# Altium PCB LYT Driver.PcbDoc
Units mil, origin at the board's own origin, x right, y up, seen from the top; angles counter-clockwise.
Board outline 3263.43 x 4160.03 mil, 2 copper layers (Top Layer, Bottom Layer); 37 components, 36 nets, 112 pads, 0 vias.
Unrouted connection lines stored in the file: 2.
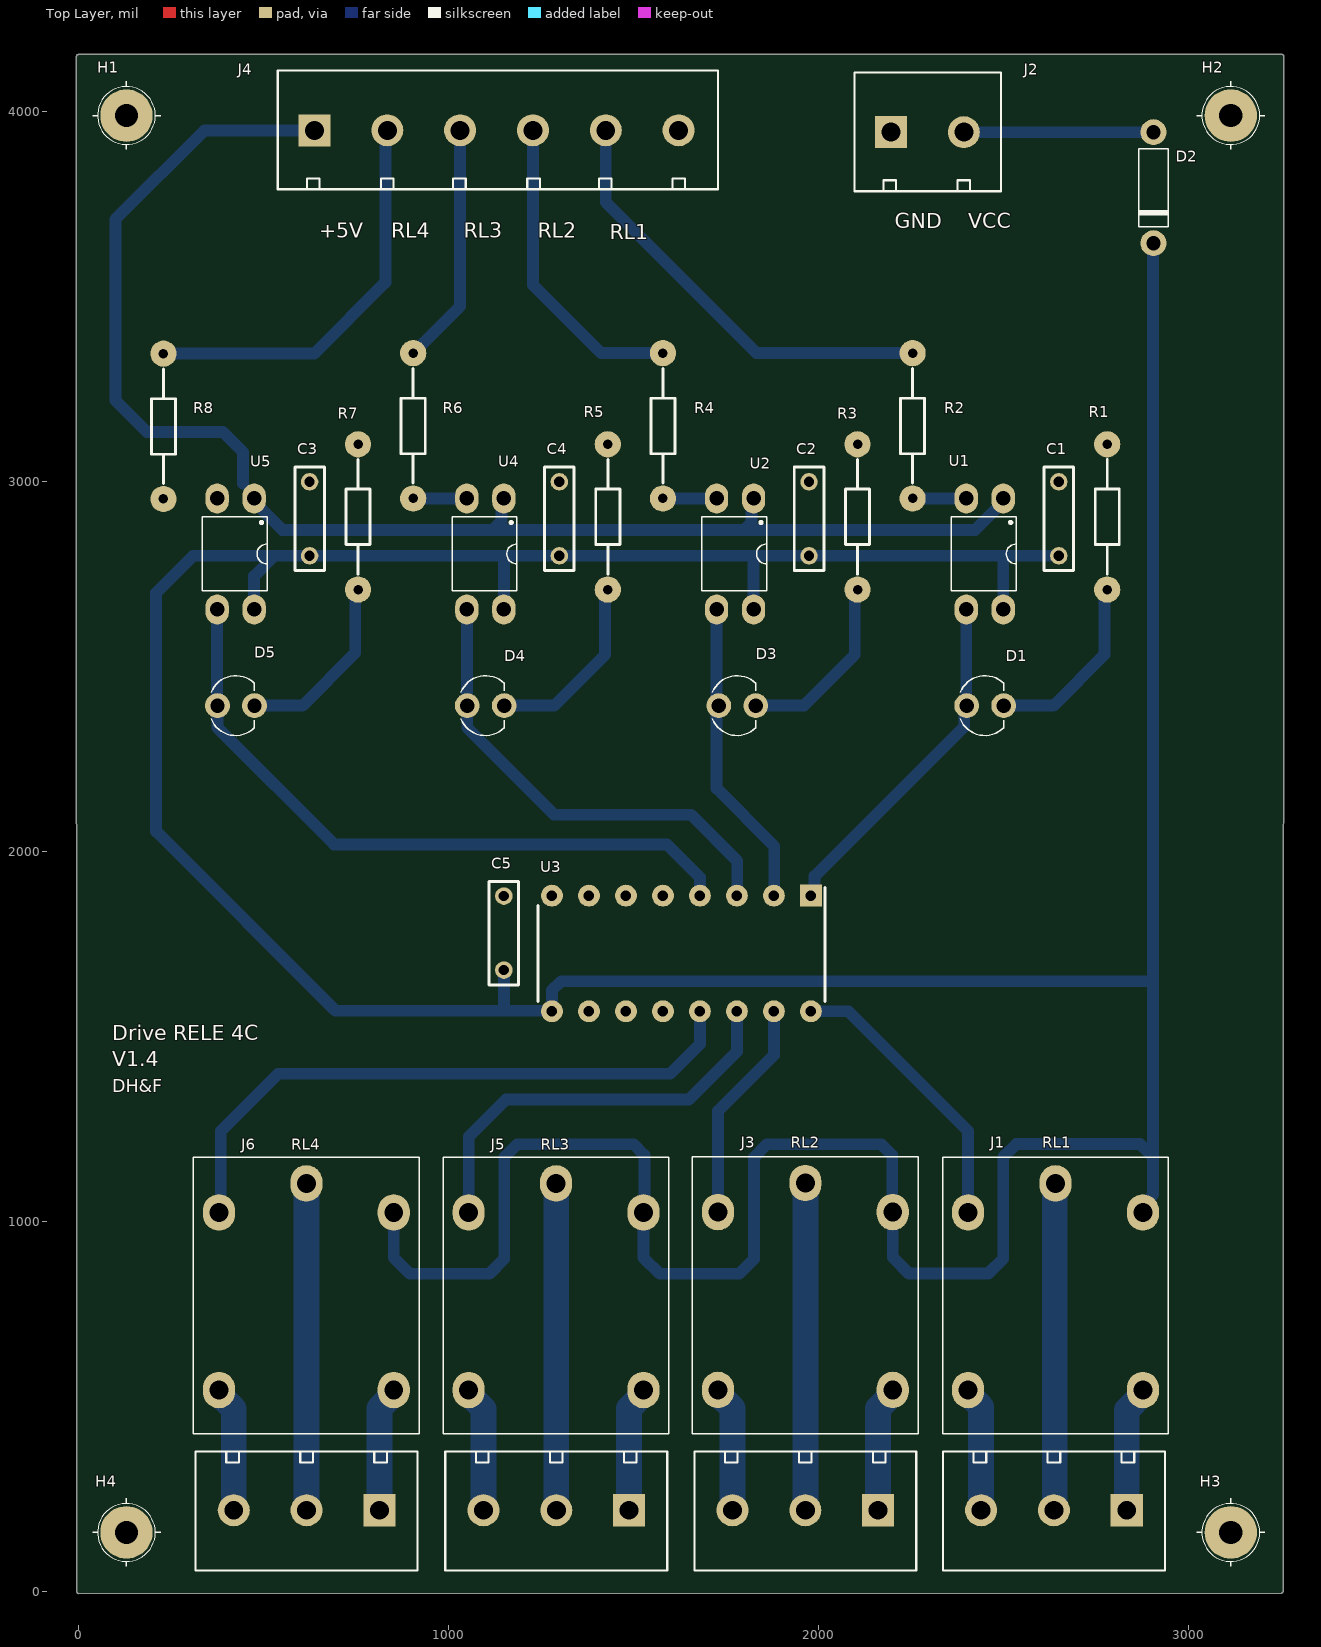
[diagram p0: Top Layer view]
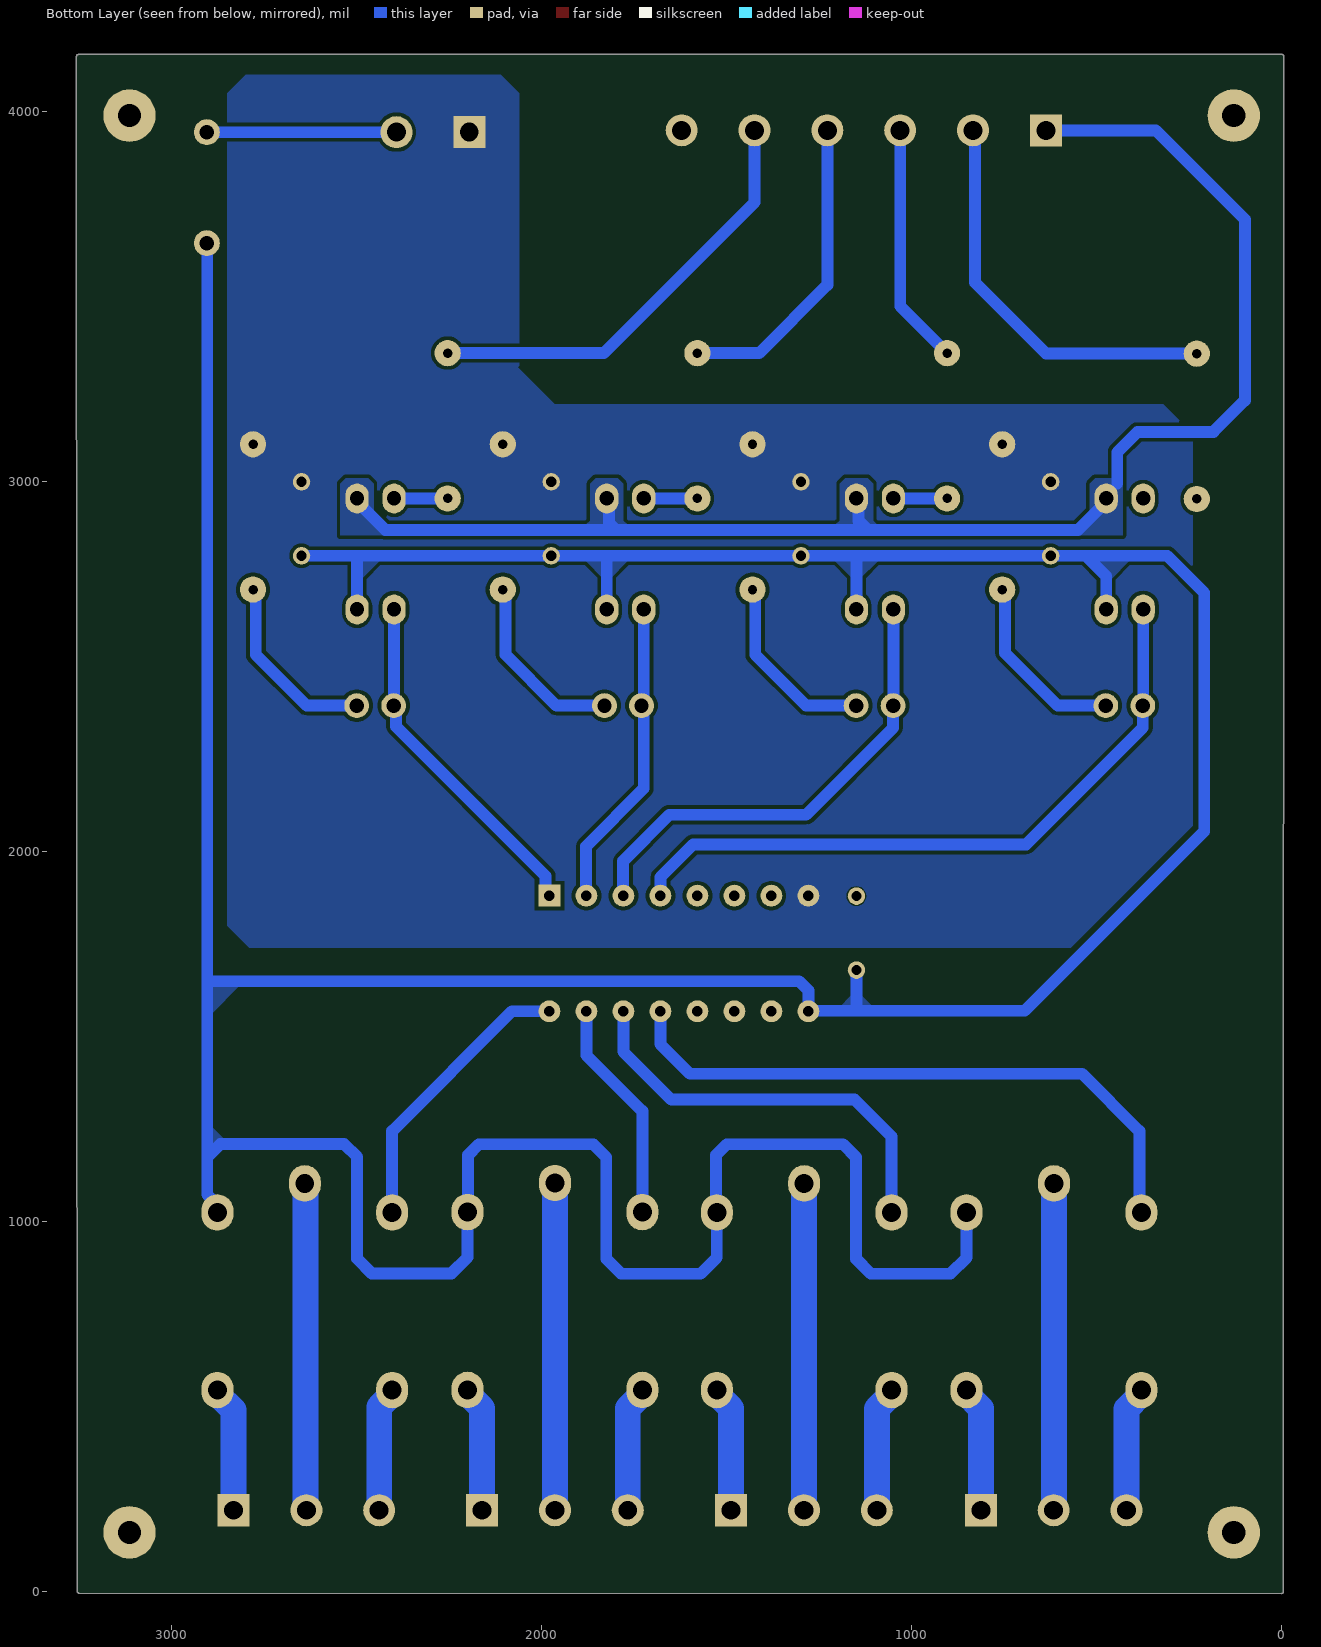
[diagram p1: Bottom Layer view, seen from below]
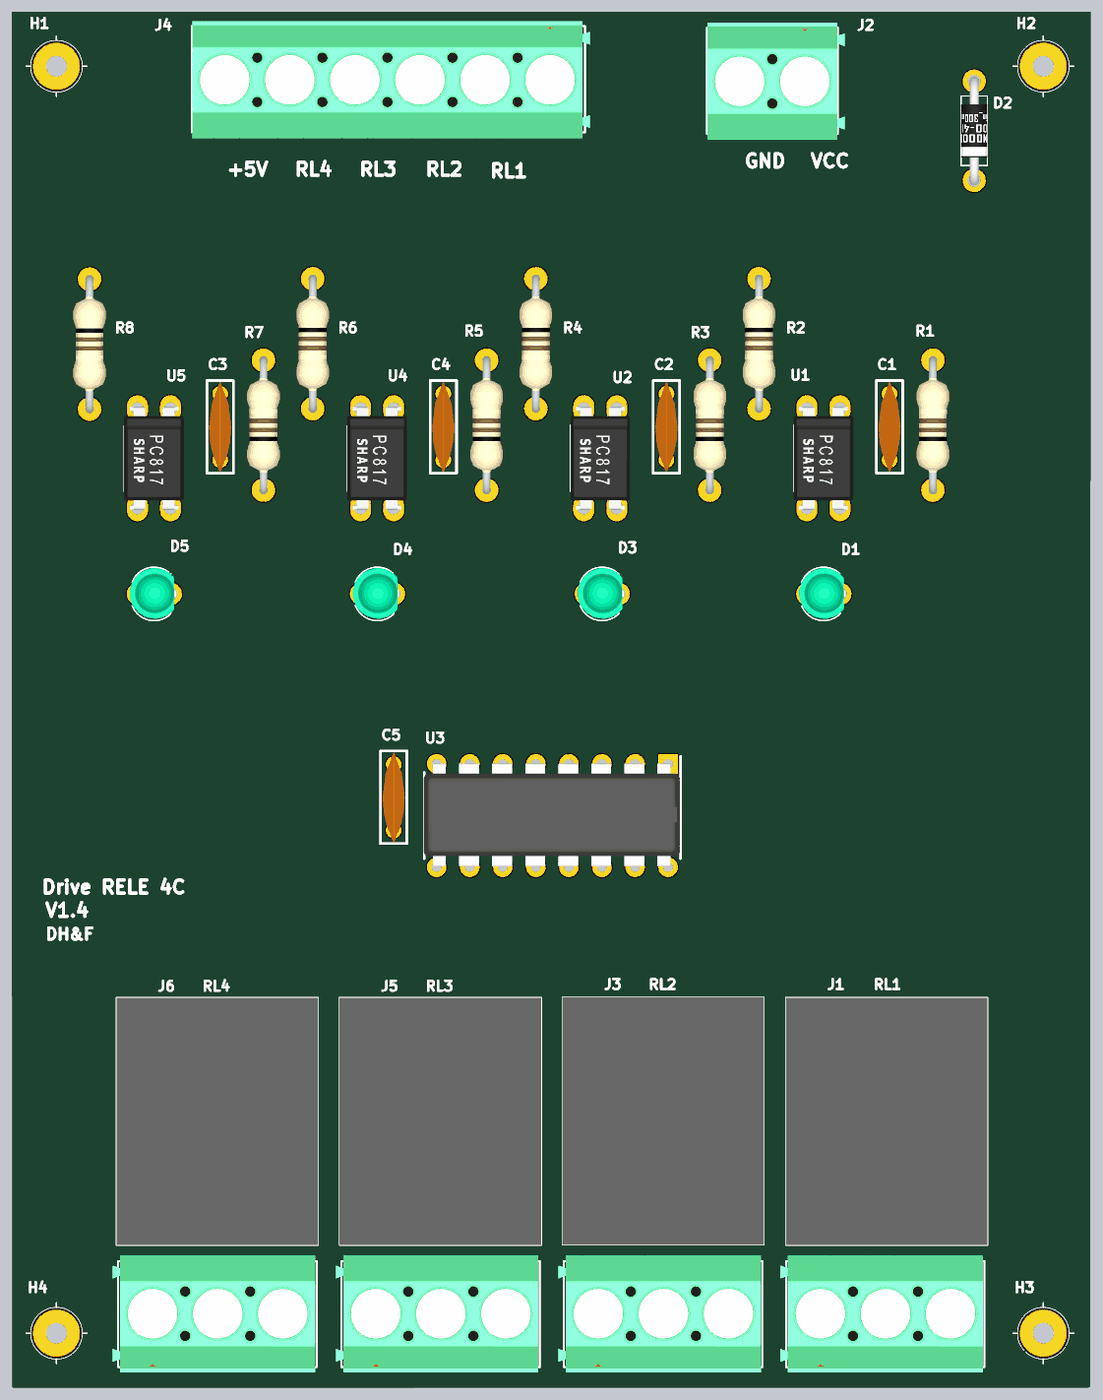
[diagram p2: 3D render of the assembled board from above, using the file's embedded part models]

## Layer stack, top to bottom
Top Solder: solder mask 0.4, Solder Resist, Dk 3.5
Top Layer: signal copper 1.4
Dielectric 1: dielectric 12.6, FR-4, Dk 4.8
Bottom Layer: signal copper 1.4
Bottom Solder: solder mask 0.4, Solder Resist, Dk 3.5

## Board outline
-5.11,0 -6.15,4150 cw(c-1.13,4150) -1.13,4155.02 3252.27,4155.02 cw(c3252.27,4150) 3257.29,4150 3255.13,1 cw(c3250.12,1) 3250.06,-4.01 3250,-4.02 0,-5.02 -0.05,-5.01 cw(c-0.09,0)

## Design rules (kind name [scope] priority, off if disabled: settings)
Clearance [All] p1: gap=10 ignorepadtopadclearanceinfootprint=FALSE except(0: Arc-Hole Track-Hole SMDPad-Hole THPad-Hole Via-Hole Fill-Hole Poly-Hole Region-Hole Text-Hole)
PolygonConnect [All] p1: connectstyle=Direct reliefconductorwidth=10 reliefentries=4 polygonreliefangle="90 Angle" airgapwidth=10
RoutingVias [All] p1: holewidth=28 width=50 viastyle="Through Hole" minholewidth=28 minwidth=50 maxholewidth=28 maxwidth=50
SolderMaskExpansion [All] p1: expansion=4 istentingtop=FALSE
Width [All] p1: maxlimit=70 minlimit=10 preferedwidth=32 toplayer_maxwidth=10 toplayer_prefwidth=10 bottomlayer_minwidth=12 minimp=50.000000 maximp=50.000000 favimp=50.000000
30 further rules are at their usual default settings.

## Components (designator, comment, footprint, x,y, rotation, side; value= is the part's Value field where it differs from the comment)
C1 "100nF" RAD-0.2 2649,2900 r270 top
C2 "100nF" RAD-0.2 1974,2900 r270 top
C3 "100nF" RAD-0.2 624,2900 r270 top
C4 "100nF" RAD-0.2 1299,2900 r270 top
C5 "100nF" RAD-0.2 1149,1780 r270 top
D1 "Valor" "LED 3MM" 2450,2395 r180 top
D2 "Valor" "1N4007 DO-41" 2905,3795 r90 top
D3 "Valor" "LED 3MM" 1780,2395 r180 top
D4 "Valor" "LED 3MM" 1100,2395 r180 top
D5 "Valor" "LED 3MM" 425,2395 r180 top
H1 "M3" "PARAFUSO M3" 129,3990 r0 top
H2 "M3" "PARAFUSO M3" 3114,3990 r0 top
H3 "M3" "PARAFUSO M3" 3114,160 r0 top
H4 "M3" "PARAFUSO M3" 129,160 r0 top
J1 "Conector 2v Phoenix" "TERMINAL BLOCK 5MM 3V" 2635.85,220 r180 top
J2 "Conector 2v Phoenix" "TERMINAL BLOCK 5MM 2V" 2294,3945 r0 top
J3 "Conector 2v Phoenix" "TERMINAL BLOCK 5MM 3V" 1964,220 r180 top
J4 "TERMINAL BLOCK 6V" "Terminal block 5mm 6V" 1129.28,3950 r0 top
J5 "Conector 2v Phoenix" "TERMINAL BLOCK 5MM 3V" 1290.85,220 r180 top
J6 "Conector 2v Phoenix" "TERMINAL BLOCK 5MM 3V" 615.85,220 r180 top
R1 "2K2" "RES 1/4 PTH" 2780,2905 r90 top
R2 "470R" "RES 1/4 PTH" 2254,3151.36 r270 top
R3 "2K2" "RES 1/4 PTH" 2105,2905 r90 top
R4 "470R" "RES 1/4 PTH" 1579,3151.36 r270 top
R5 "2K2" "RES 1/4 PTH" 1430,2905 r90 top
R6 "470R" "RES 1/4 PTH" 904,3151.36 r270 top
R7 "2K2" "RES 1/4 PTH" 755,2905 r90 top
R8 "470R" "RES 1/4 PTH" 229,3150 r270 top
RL1 "Relé 12v 5p" RELAY 2640.22,824.21 r270 top
RL2 "Relé 12v 5p" RELAY 1964,825 r270 top
RL3 "Relé 12v 5p" RELAY 1290.22,824.21 r270 top
RL4 "Relé 12v 5p" RELAY 615.22,824.21 r270 top
U1 "PC817" "PC817 DIP-4" 2449,2805 r180 top
U2 "PC817" "PC817 DIP-4" 1774,2805 r180 top
U3 "ULN2003D1013TR" PDIP-16 1629,1725 r270 top
U4 "PC817" "PC817 DIP-4" 1099,2805 r180 top
U5 "PC817" "PC817 DIP-4" 424,2805 r180 top

## Footprints (in the part's own frame and the unit in brackets; to place one, negate y for a bottom-side part, rotate by r counter-clockwise, add the part's x,y. Pads: shape width x height; smd on the part's side, far side on the other; paste and mask are expansions set on the pad)
"1N4007 DO-41" [mil]
  round 70 hole 39: 1(-150,0) 2(150,0)
  silkscreen extent -105,-40 105,40, body extent -164,-40 164,40, height 85
"LED 3MM" [mm]
  round 1.7 hole 0.991: 1(-1.27,0) 2(1.27,0)
  silkscreen extent -1.27,-2.05 1.71,2.05, body extent -1.66,-1.99 1.91,1.91, height 5.3
"PARAFUSO M3" [mm]
  round 3.6 hole 1.6 unplated: 18(0,0)
  silkscreen extent -2.33,-2.33 2.34,2.34
"PC817 DIP-4" [mm]
  oval 1.6x2.05 hole 0.991: 1(-1.27,-3.81) 2(1.27,-3.81) 3(1.27,3.81) 4(-1.27,3.81)
  silkscreen extent -2.16,-2.54 2.29,2.54, body extent -2.3,-3.94 2.3,3.94, height 4.21
PDIP-16 [mm]
  rect 1.5x1.5 / inner round 1.5 / far side rect 1.5x1.5 hole 0.73: 1(-3.97,8.89)
  round 1.5 hole 0.73: 2(-3.97,6.35) 3(-3.97,3.81) 4(-3.97,1.27) 5(-3.97,-1.27) 6(-3.97,-3.81) 7(-3.97,-6.35) 8(-3.97,-8.89) 9(3.97,-8.89) 10(3.97,-6.35) 11(3.97,-3.81) 12(3.97,-1.27) 13(3.97,1.27) 14(3.97,3.81) 15(3.97,6.35) 16(3.97,8.89)
  silkscreen extent -4.53,-9.84 3.3,9.84, body extent -3.99,-9.89 3.89,9.79, height 5.17
RAD-0.2 [mm]
  round 1.2 hole 0.7: 1(-2.54,0) 2(2.54,0)
  silkscreen extent -3.56,-1.02 3.56,1.02, body extent -3.5,-0.85 3.5,0.85, height 7.31
RELAY [mm]
  oval 2.5x2.2 hole 1.3: C1(-5.1,6) C2(-5.1,-6) COM(-7.1,0) NC(7.1,-6) NO(7.1,6)
  silkscreen extent -8.9,-7.75 10.1,7.75, body extent -8.9,-7.75 10.1,7.75, height 15.1
"RES 1/4 PTH" [mm]
  round 1.8 hole 0.65: 1(-4.988,0) 2(4.988,0)
  silkscreen extent -3.94,-0.82 3.94,0.82, body extent -5.31,-1.25 5.29,1.25, height 2.75
"TERMINAL BLOCK 5MM 2V" [mm]
  rect 2.2x2.2 hole 1.3: 1(-2.5,0)
  round 2.2 hole 1.3: 2(2.5,0)
  silkscreen extent -5.02,-4.05 5.04,4.1, body extent -4.99,-4.52 5.58,4.48, height 13.61
"TERMINAL BLOCK 5MM 3V" [mm]
  rect 2.2x2.2 hole 1.3: 1(-5,0)
  round 2.2 hole 1.3: 2(0,0) 3(5,0)
  silkscreen extent -7.62,-4.02 7.62,4.13, body extent -7.52,-4.48 8.05,4.52, height 13.61
"Terminal block 5mm 6V" [mm]
  rect 2.2x2.2 hole 1.3: 1(-12.5,0)
  round 2.2 hole 1.3: 2(-7.5,0) 3(-2.5,0) 4(2.5,0) 5(7.5,0) 6(12.5,0)
  silkscreen extent -15.02,-4.05 15.2,4.1, body extent -14.98,-4.53 15.59,4.47, height 13.61

## Part data
C1 C2 C3 C4 C5: library part CAPACITOR, "Capacitor", LatestRevisionDate=17-Jul-2002, LatestRevisionNote="Re-released for DXP Platform.", PackageDescription="Radial Cap, Thru-Hole; 2 Leads; 0.3 in Pin Spacing", PackageReference=RAD-0.3, Published=8-Jun-2000, Publisher="Altium Limited"
D1 D3 D4 D5: library part LED, "Typical RED, GREEN, YELLOW, AMBER GaAs LED", LatestRevisionDate=17-Jul-2002, LatestRevisionNote="Re-released for DXP Platform.", PackageDescription="SM LED; 2 Flat Leads", PackageReference=3.2X1.6X1.1, PackageVersion=Feb-2002, Published=8-Jun-2000, Publisher="Altium Limited"
D2: library part "DIODO 1N4007", "Diodo rapido", Code_JEDEC=DO-204-AH, ComponentLink1Description="Manufacturer Link", ComponentLink1URL=http://www.fairchildsemi.com/, ComponentLink2Description=Datasheet, ComponentLink2URL=http://www.fairchildsemi.com/ds/1N%2F1N4148.pdf, DatasheetVersion=1997, LatestRevisionDate=17-Jul-2002, LatestRevisionNote="Re-released for DXP Platform.", PackageDescription="Diode, Axial; Body 3.8 x 1.9 mm (LxDia. max), Lead Dia. 0.53 mm (max)", PackageReference=DO-35, Published=8-Jun-2000, Publisher="Altium Limited"
H1 H2 H3 H4: library part "Furo M3"
J1 J3 J5 J6: library part "TERMINAL BLOCK 3V", "Block, Terminal; 6 A; 63 V; 5 mm; 26 to 20 AWG; 3; Screw; Soldering; 1.5 kV", Color=Green, Current=6A, Flammability Rating="UL94 V-0", Manufacturer="Phoenix Contact", Manufacturer Part Number=1725656, Max Supply Voltage=63V, Package Quantity=50, Supplier Part Number 1=651-1725656, Voltage=125V, Approvals=UL,CSA,cULus,EAC, Category="Terminal Blocks", ComponentLink1Description=https://datasheet.ciiva.com/16071/1725656-16071846.pdf?src-supplier=Onlinecomponents.com, ComponentLink1URL=https://datasheet.ciiva.com/16071/1725656-16071846.pdf?src-supplier=Onlinecomponents.com, ComponentLink2Description=https://datasheet.ciiva.com/15169/getdatasheetpartid-199323-15169849.pdf?src-supplier=Verical, ComponentLink2URL=https://datasheet.ciiva.com/15169/getdatasheetpartid-199323-15169849.pdf?src-supplier=Verical, ComponentLink3Description=https://datasheet.ciiva.com/823/1725656-823793.pdf?src-supplier=Digi-Key, ComponentLink3URL=https://datasheet.ciiva.com/823/1725656-823793.pdf?src-supplier=Digi-Key, ComponentLink4Description=https://datasheet.ciiva.com/1120/319957-1120510.pdf?src-supplier=Farnell, ComponentLink4URL=https://datasheet.ciiva.com/1120/319957-1120510.pdf?src-supplier=Farnell, ComponentLink5Description=https://datasheet.ciiva.com/26340/788052-da-01-en-100ntklemme-1725656-250-st-26340907.pdf?src-supplier=Conrad, ComponentLink5URL=https://datasheet.ciiva.com/26340/788052-da-01-en-100ntklemme-1725656-250-st-26340907.pdf?src-supplier=Conrad, Connector Type="Screw,PCB,Terminal Block", Contact Material=Tin, Current Rating=6A, Depth=6.2mm, Height=6.2mm, Housing Color=Green, Housing Material=Polyamide, Insulation Material=Nylon, Lead Free="Lead Free", Length=5.54mm, Max Current Rating=6A, Mount="Through Hole", Number of Circuits=2, Number of Contacts=2, Number of Levels=1, Number of Pins=2, Number of Poles=2, Number of Positions=2, Number of Positions Per Level=2, Number of Rows=1, Orientation=Straight, Packaging=Bulk, Pitch=2.54mm, Pricing 1="1=1,94000, 10=1,76000, 50=1,69000, 100=1,64000, 1000=1,27000, 10000=1,17000 (USD)", Radiation Hardening=No, Reach SVHC Compliant=Yes, RoHS=Yes, RoHS Compliant=Yes, Series=MPT, Stock 1=29866, Stripping Length=4.5mm, Termination=Solder, Voltage Rating=125V, Weight=0.022575oz, Width=12mm, Wire Gauge (Max)=26AWG, Wire Gauge (Min)=20AWG, Wire/Cable Gauge=26AWG
J2: library part "TERMINAL BLOCK 2V", "Block, Terminal; 6 A; 63 V; 5 mm; 26 to 20 AWG; 2; Screw; Soldering; 1.5 kV", Color=Green, Current=6A, Flammability Rating="UL94 V-0", Manufacturer="Phoenix Contact", Manufacturer Part Number=1725656, Max Supply Voltage=63V, Package Quantity=50, Supplier Part Number 1=651-1725656, Voltage=125V, Approvals=UL,CSA,cULus,EAC, Category="Terminal Blocks", ComponentLink1Description=https://datasheet.ciiva.com/16071/1725656-16071846.pdf?src-supplier=Onlinecomponents.com, ComponentLink1URL=https://datasheet.ciiva.com/16071/1725656-16071846.pdf?src-supplier=Onlinecomponents.com, ComponentLink2Description=https://datasheet.ciiva.com/15169/getdatasheetpartid-199323-15169849.pdf?src-supplier=Verical, ComponentLink2URL=https://datasheet.ciiva.com/15169/getdatasheetpartid-199323-15169849.pdf?src-supplier=Verical, ComponentLink3Description=https://datasheet.ciiva.com/823/1725656-823793.pdf?src-supplier=Digi-Key, ComponentLink3URL=https://datasheet.ciiva.com/823/1725656-823793.pdf?src-supplier=Digi-Key, ComponentLink4Description=https://datasheet.ciiva.com/1120/319957-1120510.pdf?src-supplier=Farnell, ComponentLink4URL=https://datasheet.ciiva.com/1120/319957-1120510.pdf?src-supplier=Farnell, ComponentLink5Description=https://datasheet.ciiva.com/26340/788052-da-01-en-100ntklemme-1725656-250-st-26340907.pdf?src-supplier=Conrad, ComponentLink5URL=https://datasheet.ciiva.com/26340/788052-da-01-en-100ntklemme-1725656-250-st-26340907.pdf?src-supplier=Conrad, Connector Type="Screw,PCB,Terminal Block", Contact Material=Tin, Current Rating=6A, Depth=6.2mm, Height=6.2mm, Housing Color=Green, Housing Material=Polyamide, Insulation Material=Nylon, Lead Free="Lead Free", Length=5.54mm, Max Current Rating=6A, Mount="Through Hole", Number of Circuits=2, Number of Contacts=2, Number of Levels=1, Number of Pins=2, Number of Poles=2, Number of Positions=2, Number of Positions Per Level=2, Number of Rows=1, Orientation=Straight, Packaging=Bulk, Pitch=2.54mm, Pricing 1="1=1,94000, 10=1,76000, 50=1,69000, 100=1,64000, 1000=1,27000, 10000=1,17000 (USD)", Radiation Hardening=No, Reach SVHC Compliant=Yes, RoHS=Yes, RoHS Compliant=Yes, Series=MPT, Stock 1=29866, Stripping Length=4.5mm, Termination=Solder, Voltage Rating=125V, Weight=0.022575oz, Width=12mm, Wire Gauge (Max)=26AWG, Wire Gauge (Min)=20AWG, Wire/Cable Gauge=26AWG
J4: "Block, Terminal; 6 A; 63 V; 5 mm; 26 to 20 AWG; 6 Screw; Soldering; 1.5 kV"
R1 R2 R3 R4 R5 R6 R7 R8: library part "RESISTOR 1/4W", "Resistor", LatestRevisionDate=17-Jul-2002, LatestRevisionNote="Re-released for DXP Platform.", PackageDescription="Axial Device, Thru-Hole; 2 Leads; 0.4 in Pin Spacing", PackageReference=AXIAL-0.4, Published=8-Jun-2000, Publisher="Altium Limited"
U3: "ULN Series 50V 500 mA High Voltage High Current Seven Darlington Array - SOIC-16", Case/Package=SO, Collector Emitter Breakdown Voltage=50V, Collector Emitter Saturation Voltage=1.1V, Collector-emitter Voltage-Max=1.6V, Current Rating=500mA, Manufacturer=STMicroelectronics, Max Operating Temperature=85°C, Min Operating Temperature=-40°C, Package Quantity=1, Supplier Part Number 1=511-ULN2003D1013TR, Category=BJTs, Collector Emitter Voltage (VCEO)=50V, ComponentLink1Description=https://datasheet.ciiva.com/1193/1690348-1193460.pdf?src-supplier=Element14, ComponentLink1URL=https://datasheet.ciiva.com/1193/1690348-1193460.pdf?src-supplier=Element14, ComponentLink2Description=https://datasheet.ciiva.com/27056/2004591-27056027.pdf?src-supplier=Jameco, ComponentLink2URL=https://datasheet.ciiva.com/27056/2004591-27056027.pdf?src-supplier=Jameco, ComponentLink3Description=https://datasheet.ciiva.com/15139/getdatasheetpartid-40506-15139848.pdf?src-supplier=Verical, ComponentLink3URL=https://datasheet.ciiva.com/15139/getdatasheetpartid-40506-15139848.pdf?src-supplier=Verical, ComponentLink4Description=https://datasheet.ciiva.com/22696/1690348-22696618.pdf?src-supplier=Element14, ComponentLink4URL=https://datasheet.ciiva.com/22696/1690348-22696618.pdf?src-supplier=Element14, ComponentLink5Description=https://datasheet.ciiva.com/22635/1690348-22635247.pdf?src-supplier=Element14, ComponentLink5URL=https://datasheet.ciiva.com/22635/1690348-22635247.pdf?src-supplier=Element14, ComponentLink6Description=https://datasheet.ciiva.com/1700/cd00001244-1700815.pdf?src-supplier=Digi-Key, ComponentLink6URL=https://datasheet.ciiva.com/1700/cd00001244-1700815.pdf?src-supplier=Digi-Key, ComponentLink7Description=https://datasheet.ciiva.com/1700/cd00001244-1700814.pdf?src-supplier=Digi-Key, ComponentLink7URL=https://datasheet.ciiva.com/1700/cd00001244-1700814.pdf?src-supplier=Digi-Key, ComponentLink8Description=https://datasheet.ciiva.com/1700/cd00001244-1700816.pdf?src-supplier=Digi-Key, ComponentLink8URL=https://datasheet.ciiva.com/1700/cd00001244-1700816.pdf?src-supplier=Digi-Key, ComponentLink9Description=https://datasheet.ciiva.com/4459/cd00001244-4459145.pdf?src-supplier=Mouser, ComponentLink9URL=https://datasheet.ciiva.com/4459/cd00001244-4459145.pdf?src-supplier=Mouser, Contact Plating=Gold, Height=1.65mm, Lead Free="Lead Free", Length=10mm, Manufacturer Part Number=ULN2003D1013TR, Max Breakdown Voltage=50V, Max Collector Current=500mA, Mount="Surface Mount", Number of Elements=7, Number of Pins=16, Output Current=500mA, Output Voltage=50V, Packaging="Tape and Reel", Polarity=NPN, Pricing 1="1=0,77000, 10=0,67600, 50=0,67600, 100=0,51800, 1000=0,32800, 10000=0,30800 (USD)", Radiation Hardening=No, Reach SVHC Compliant=Yes, RoHS=Yes, RoHS Compliant=Yes, Series=-, Stock 1=88835, Voltage Rating (DC)=50V, Weight=0.007079oz, Width=4mm

## Nets (pads, with @x,y where several pads share a name; then routed paths per layer and width w, separated by ;. In a path a pad name is that pad's centre, name@x,y a point inside that pad or via, vN(x,y) a via of type N, cw(c..) or ccw(c..) an arc to the next point about the centre after c; other vN are vias at no path point)
+5: J4.1 U1.1 U2.1 U4.1 U5.1 | length 3919.8
  Bottom Layer w32: 444,2995 444,3080 389,3135 184,3135 99,3220 99,3709 340,3950 J4.1 ; U5.1 474,2946.14 550.14,2870 1119,2870 ; U4.1 1143.07,2949.07 1143.07,2894.07 1119,2870 ; U2.1 1818.07,2949.07 1818.07,2889.07 1799,2870 ; U1.1@2499,2946.14 2422.86,2870 1799,2870 ; U1.1 U1.1@2499,2970.1 ; 1119,2870 1799,2870
COM: J1.2 RL1.COM | length 885.6
  Bottom Layer w70: J1.2 2638.04,222.19 2638.04,1101.56 RL1.COM
COM1: J3.2 RL2.COM | length 884.5
  Bottom Layer w70: J3.2 RL2.COM
COM2: J5.2 RL3.COM | length 884
  Bottom Layer w70: RL3.COM 1290.54,1103.43 1290.54,220.31 J5.2
COM3: J6.2 RL4.COM | length 884
  Bottom Layer w70: RL4.COM 615.54,1103.43 615.54,220.31 J6.2
GND: C1.1 C2.1 C3.1 C4.1 C5.1 J2.1 R1.2 R3.2 R5.2 R7.2 U3.8 | length 1.8
  Bottom Layer w32: C5.1 C5.1@1149.65,1880.65 ; U3.8@1278.35,1880.65 U3.8
NC: J1.3 RL1.NC | length 339.2
  Bottom Layer w70: RL1.NC 2404,534.28 2439,499.28 J1.3
NC1: J3.3 RL2.NC | length 341.8
  Bottom Layer w70: RL2.NC 1727.78,535.07 1767.15,495.7 J3.3
NC2: J5.3 RL3.NC | length 341.3
  Bottom Layer w70: RL3.NC 1054,534.28 1094,494.28 J5.3
NC3: J6.3 RL4.NC | length 341.3
  Bottom Layer w70: RL4.NC 379,534.28 419,494.28 J6.3
NetD1_1: D1.1 R1.1 | length 508.7
  Bottom Layer w32: D1.1 2635,2395 2772.56,2532.56 2772.56,2701.2 R1.1
NetD1_2: D1.2 U1.3 U3.1 | length 947.7
  Bottom Layer w32: U3.1 1979,1884.71 1989.12,1894.83 1989.12,1934.12 2393.32,2338.32 2393.32,2389.32 2399,2395 U1.3
NetD2_2: D2.2 J2.2 | length 512.6
  Bottom Layer w32: J2.2 D2.2
NetD3_1: D3.1 R3.1 | length 503.7
  Bottom Layer w32: D3.1 1960,2395 2097.56,2532.56 2097.56,2701.2 R3.1
NetD3_2: D3.2 U2.3 U3.2 | length 838.7
  Bottom Layer w32: U2.3 1724,2171 1880,2015 1880,1882.3 U3.2
NetD4_1: D4.1 R5.1 | length 508.7
  Bottom Layer w32: D4.1 1285,2395 1422.56,2532.56 1422.56,2701.2 R5.1
NetD4_2: D4.2 U3.3 U4.3 | length 1304.2
  Bottom Layer w32: D4.2@1049,2384 U4.3 ; D4.2 1050,2335 1285,2100 1655,2100 1780,1975 1780,1882.3 U3.3
NetD5_1: D5.1 R7.1 | length 505.8
  Bottom Layer w32: D5.1 605,2395 747.56,2537.56 747.56,2701.2 R7.1
NetD5_2: D5.2 U3.4 U5.3 | length 1852
  Bottom Layer w32: D5.2@374,2384 U5.3 ; D5.2 375,2335 690,2020 1590,2020 1679,1931 U3.4
NetR2_2: R2.2 U1.2 | length 145
  Bottom Layer w32: R2.2 U1.2
NetR4_2: R4.2 U2.2 | length 145
  Bottom Layer w32: R4.2 U2.2
NetR6_2: R6.2 U4.2 | length 145
  Bottom Layer w32: R6.2 U4.2
NetR8_2: R8.2 U5.2 | length 1.9
  Bottom Layer w32: R8.2 R8.2@229.68,2954.32 ; U5.2@373.32,2954.32 U5.2
NetRL1_C2: RL1.C2 U3.16 | length 779.1
  Bottom Layer w32: U3.16 2080.3,1568.7 2404,1245 RL1.C2
NetRL2_C2: RL2.C2 U3.15 | length 605.6
  Bottom Layer w32: RL2.C2 1727.78,1298.78 1879,1450 U3.15
NetRL3_C2: RL3.C2 U3.14 | length 1134
  Bottom Layer w32: RL3.C2 1054,1230 1154,1330 1649,1330 1779,1460 U3.14
NetRL4_C2: RL4.C2 U3.13 | length 1703.1
  Bottom Layer w32: RL4.C2 384,1030 384,1245 539,1400 1599,1400 1679,1480 U3.13
NO: J1.1 RL1.NO | length 342.8
  Bottom Layer w70: J1.1 2832.7,490.54 2876.44,534.28 RL1.NO
NO1: J3.1 RL2.NO | length 341.8
  Bottom Layer w70: J3.1 2160.85,495.7 2200.22,535.07 RL2.NO
NO2: J5.1 RL3.NO | length 340.7
  Bottom Layer w70: J5.1 1487.7,495.54 1526.44,534.28 RL3.NO
NO3: J6.1 RL4.NO | length 340.7
  Bottom Layer w70: J6.1 812.7,495.54 851.44,534.28 RL4.NO
RL1: J4.5 R2.1 | length 1192.9
  Bottom Layer w32: J4.5 1424.55,3755.45 1832.28,3347.72 R2.1
RL2: J4.4 R4.1 | length 845.5
  Bottom Layer w32: J4.4 1227.7,3532.3 1412.28,3347.72 R4.1
RL3: J4.3 R6.1 | length 654.8
  Bottom Layer w32: R6.1 1030.85,3474.57 J4.3
RL4: J4.2 R8.1 | length 1092.9
  Bottom Layer w32: R8.1 636.36,3346.36 828.94,3538.94 828.94,3944.94 J4.2
VCC: C1.2 C2.2 C3.2 C4.2 C5.2 D2.1 RL1.C1 RL2.C1 RL3.C1 RL4.C1 U1.4 U2.4 U3.9 U4.4 U5.4 | length 13188.7
  Bottom Layer w32: U5.4 474,2745 529,2800 ; RL4.C1 851.44,902.99 895.22,859.21 1110.22,859.21 1150.22,899.21 1150.22,1174.21 1185.22,1209.21 1499.79,1209.21 1529,1180 1529,1027.56 RL3.C1 1526.44,902.99 1570.22,859.21 1785.22,859.21 1825.22,899.21 1825.22,1174.21 1860.22,1209.21 2169.79,1209.21 2199,1180 2199,1027.01 RL2.C1 2200.22,903.78 2244,860 2459,860 2499,900 2499,1175 2534,1210 2868.61,1210 2904,1174.61 ; C5.2 1149,1570 ; U4.4 1149,2800 ; U2.4 1824,2800 ; U1.4 2499,2800 ; C1.2 2499,2800 ; RL1.C1@2866.1,1035.34 RL1.C1 2876.44,1045.68 2904,1073.24 2904,1174.61 ; D2.1@2904,3645 2904,1650 ; 529,2800 309,2800 209,2700 209,2055 694,1570 1149,1570 ; 529,2800 C3.2 1149,2800 ; 1149,1570 1279,1570 1279,1625 1304,1650 2904,1650 ; 1149,2800 C4.2 1824,2800 ; 1824,2800 C2.2 2499,2800 ; 2904,1174.61 2904,1650
pads on no net: H1.18 H2.18 H3.18 H4.18 J4.6 U3.5 U3.6 U3.7 U3.10 U3.11 U3.12

## Polygon pours and split planes (outlines as drawn)
GND on Bottom Layer "GND_L02_P024" (solid, pour order 24): 2060,4050 2110,4100 2800,4100 2850,4050 2850,1800 2790,1740 570,1740 240,2070 240,3130 320,3210 1964.64,3210 2064.15,3309.51 2060,3313.66
VCC on Bottom Layer "VCC_L02_P020" (solid, pour order 20): 1149,1625 1084,1560 1214,1560
VCC on Bottom Layer "VCC_L02_P019" (solid, pour order 19): 2904,1190 2904,1270 2839,1205
VCC on Bottom Layer "VCC_L02_P018" (solid, pour order 18): 2904,1650 2904,1550 2804,1650
VCC on Bottom Layer "VCC_L02_P008" (solid, pour order 8): 2500.62,2723.38 2512.21,2793.38 2430.62,2793.38
VCC on Bottom Layer "VCC_L02_P007" (solid, pour order 7): 1824,2729 1894,2799 1754,2799
VCC on Bottom Layer "VCC_L02_P006" (solid, pour order 6): 1149,2728 1219,2798 1079,2798
VCC on Bottom Layer "VCC_L02_P005" (solid, pour order 5): 469,2729 539,2799 399,2799
+5 on Bottom Layer "+5_L02_P004" (solid, pour order 4): 464,3010 444,3010 429,2995 429,2855 559,2855 519,2895 519,2995 504,3010
+5 on Bottom Layer "+5_L02_P003" (solid, pour order 3): 2489,3010 2469,3010 2454,2995 2454,2895 2414,2855 2544,2855 2544,2895 2544,2995 2529,3010
+5 on Bottom Layer "+5_L02_P002" (solid, pour order 2): 1814,3010 1794,3010 1779,2995 1779,2895 1764,2880 1884,2880 1869,2895 1869,2995 1854,3010
+5 on Bottom Layer "+5_L02_P001" (solid, pour order 1): 1139,3010 1119,3010 1104,2995 1104,2895 1089,2880 1209,2880 1194,2895 1194,2995 1179,3010

## Silkscreen, mask and mechanical layers (free items; w line width, h text height)
Top Overlay:
  text "GND" at 2205,3685 h40
  text "VCC" at 2404.95,3685 h40
  text "+5V" at 650.18,3660 h40
  text "RL4" at 845,3660 h40
  text "RL3" at 1040,3660 h40
  text "RL2" at 1240,3660 h40
  text "RL1" at 1435,3655 h40
  text "Drive RELE 4C" at 90,1490 h40
  text "V1.4" at 90,1420 h40
  text "DH&F" at 90,1350 h35
Board shape:
  lines w10: -0.09,0 -1.13,4150 3252.27,4150 3250.12,1 ; 0,0 3250,1 3250,146